# Altium PCB LDO.PcbDoc
Units mil, origin at the board's own origin, x right, y up, seen from the top; angles counter-clockwise.
Board outline 2495 x 920 mil, 4 copper layers (Top Layer, Gnd Layer, Pwr Layer, Bottom Layer), stack 23.756 mil thick; 11 components, 7 nets, 35 pads, 3 vias.
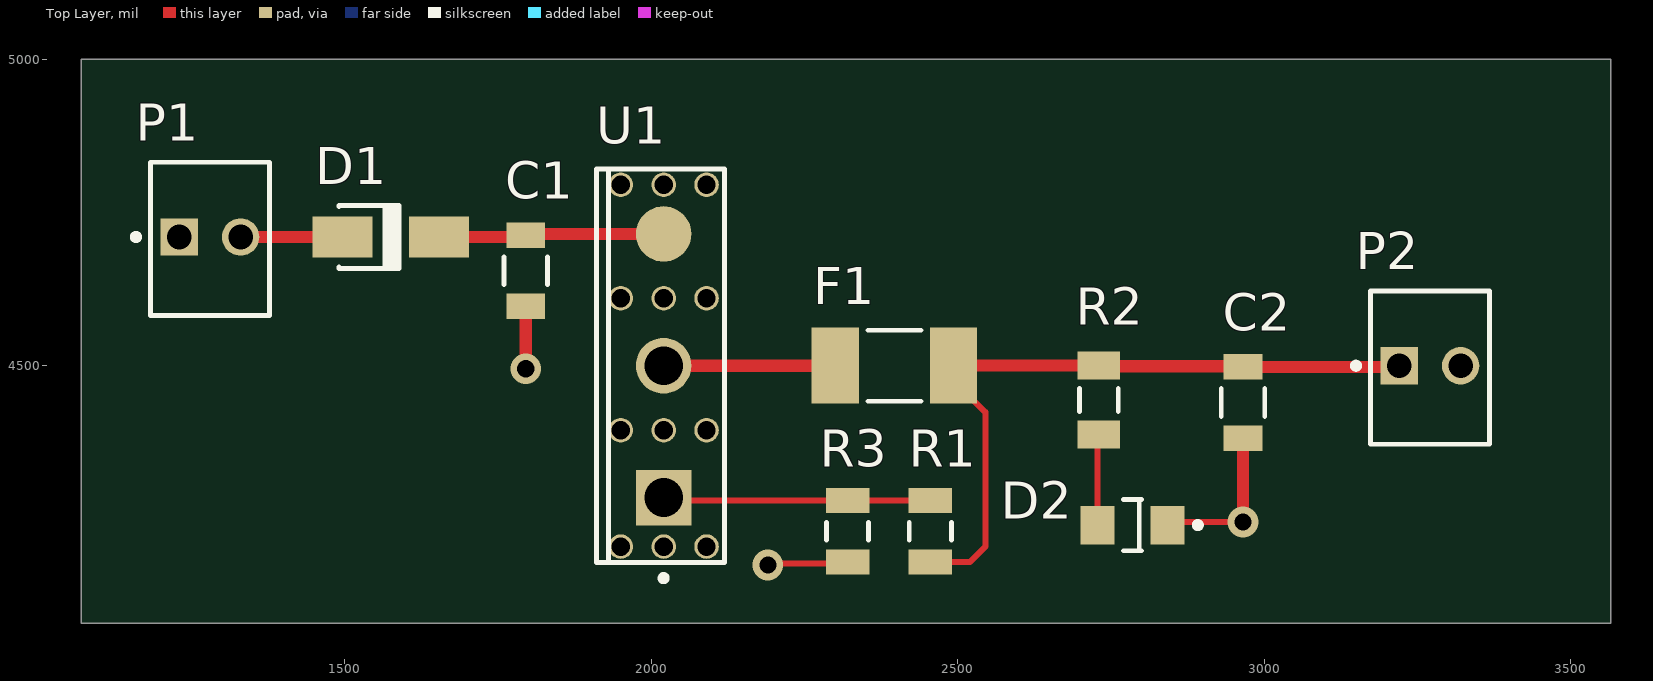
[diagram p0: Top Layer view]
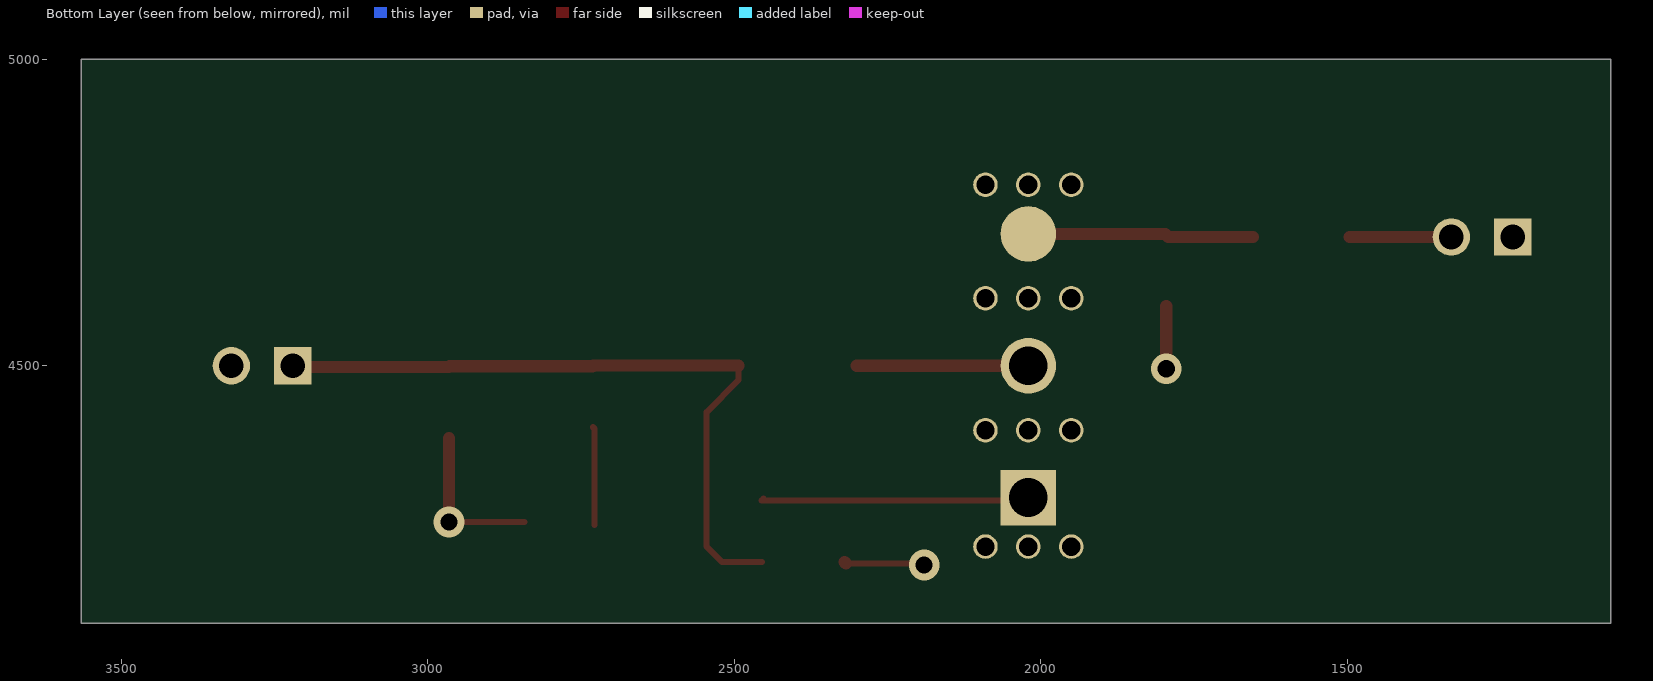
[diagram p1: Bottom Layer view, seen from below]
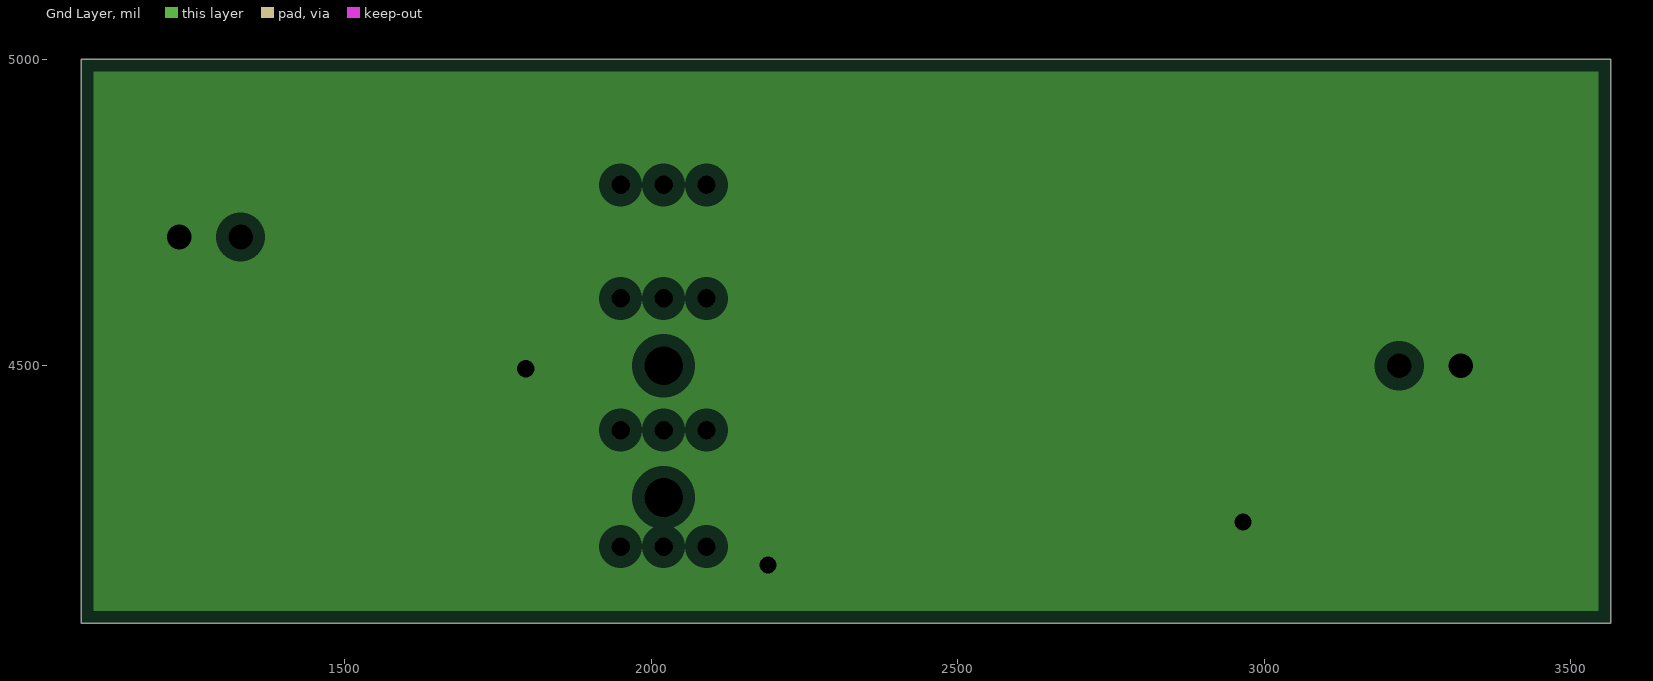
[diagram p2: Gnd Layer, clearances drawn from the general rule]
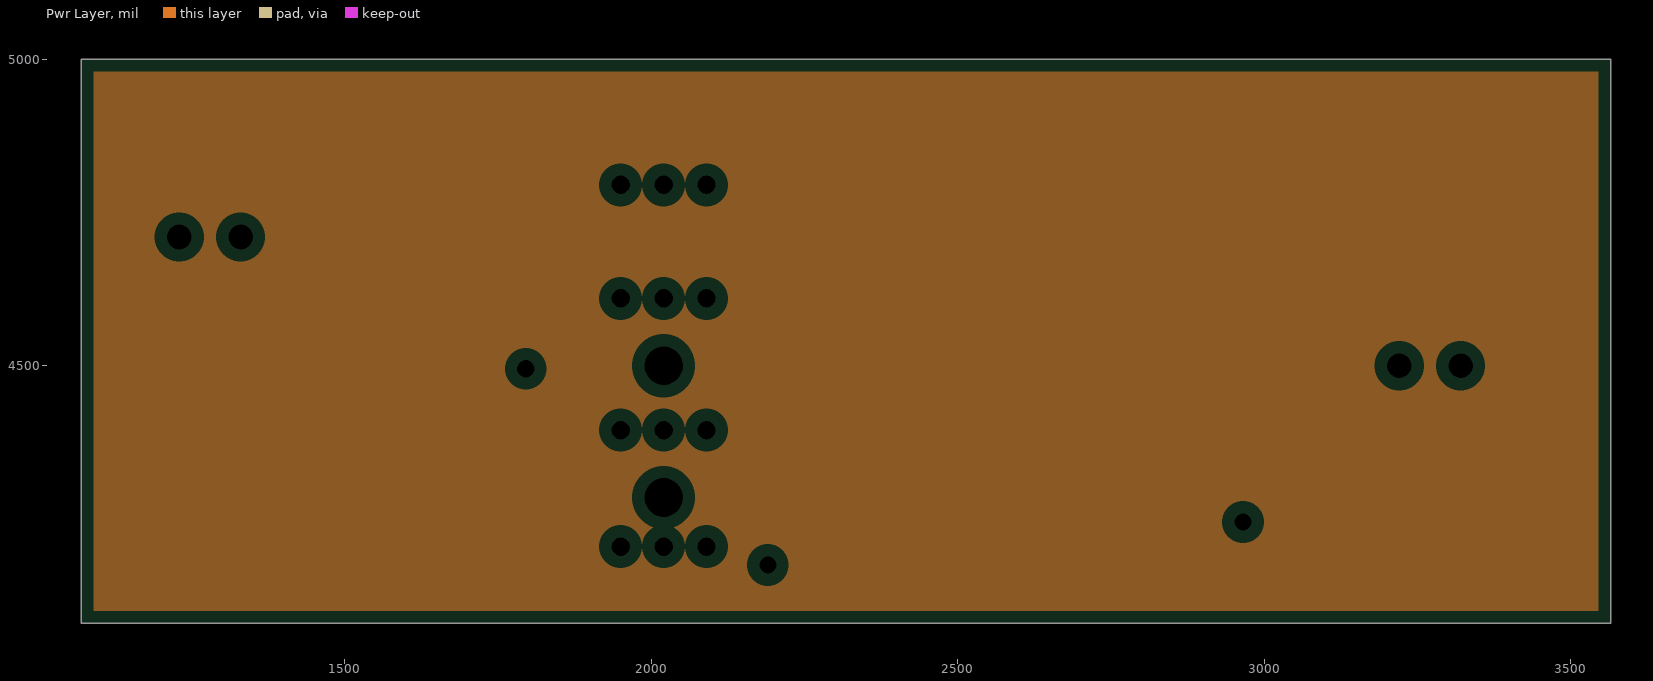
[diagram p3: Pwr Layer, clearances drawn from the general rule]
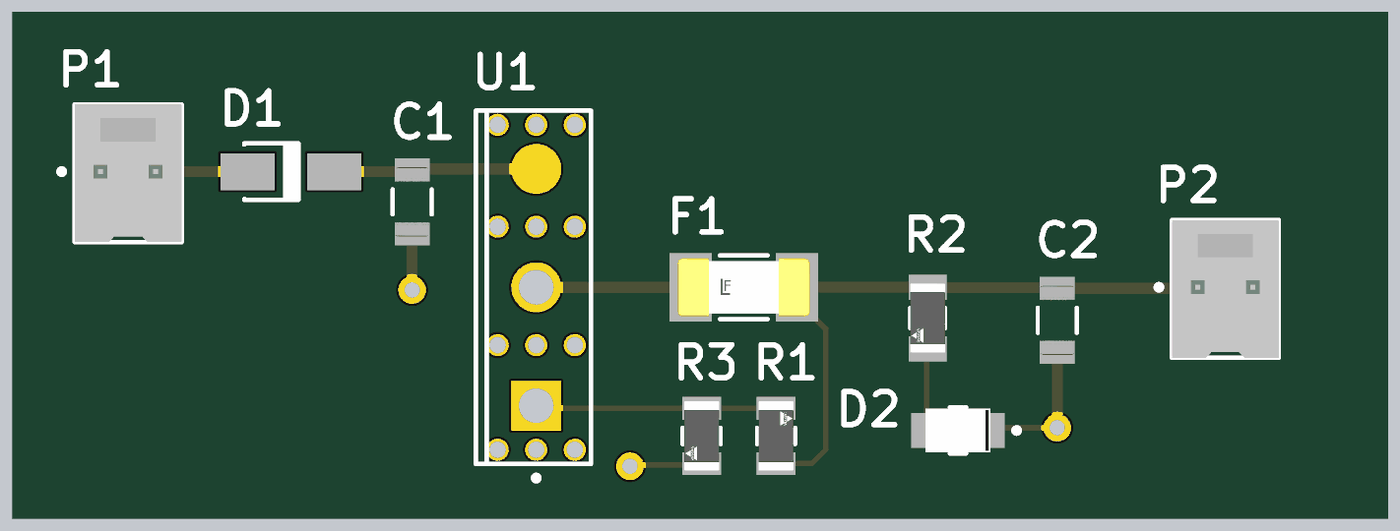
[diagram p4: 3D render of the assembled board from above, using the file's embedded part models]

## Layer stack, top to bottom
Top Solder: solder mask 0.4, Solder Resist, Dk 3.5
Top Layer: signal copper 1.4
Dielectric 2: prepreg 2.8, PP-006, Dk 4.1
Gnd Layer: plane copper 1.378, net GND
Dielectric 1: dielectric 12.6, FR-4, Dk 4.8
Pwr Layer: plane copper 1.378
Dielectric 3: prepreg 2.8, PP-006, Dk 4.1
Bottom Layer: signal copper 1.4
Bottom Solder: solder mask 0.4, Solder Resist, Dk 3.5

## Board outline
1070,4080 3565,4080 3565,5000 1070,5000

## Design rules (kind name [scope] priority, off if disabled: settings)
Clearance [All] p1: gap=10 ignorepadtopadclearanceinfootprint=TRUE except(0: Arc-Hole Track-Hole SMDPad-Hole THPad-Hole Via-Hole Fill-Hole Poly-Hole Region-Hole Text-Hole)
PlaneClearance [All] p1: clearance=20
PlaneConnect [All] p1: planeconnectstyle=Relief reliefexpansion=20 reliefentries=4 reliefconductorwidth=10 reliefairgap=10
PolygonConnect [All] p1: connectstyle=Relief reliefconductorwidth=10 reliefentries=4 polygonreliefangle="90 Angle" airgapwidth=10
RoutingVias [All] p1: holewidth=28 width=50 viastyle="Through Hole" minholewidth=28 minwidth=50 maxholewidth=28 maxwidth=50
SolderMaskExpansion [All] p1: expansion=4 istentingtop=FALSE
Width [All] p1: maxlimit=20 minlimit=10 preferedwidth=20 bottomlayer_prefwidth=10 minimp=50.000000 maximp=50.000000 favimp=50.000000
28 further rules are at their usual default settings.

## Components (designator, comment, footprint, x,y, rotation, side; value= is the part's Value field where it differs from the comment)
C1 "GRM31CR61H106KA12L" FP-GRM31-0_2-MFG 1795,4655 r270 top value=10uF
C2 "GRM31CR61H106KA12L" FP-GRM31-0_2-MFG 2965,4440 r270 top value=10uF
D1 "B230A-13-F" DIOD-SMA-2_V 1575,4710 r0 top
D2 "597-3301-507F" FP-597-3301-507F-MFG 2785,4240 r180 top
F1 "0451002.MRL" FP-0451-MFG 2396.5,4500 r0 top value=0.0367Ω
P1 "22-23-2021" MOLX-22-23-2021_V 1280,4710 r0 top
P2 "22-23-2021" MOLX-22-23-2021_V 3270,4500 r0 top
R1 "CRCW1206100RFKEA" FP-CRCW1206-e3-MFG 2455,4230 r90 top
R2 "CRCW1206499RFKEA" FP-CRCW1206-e3-IPC_B 2730,4444.1 r270 top
R3 "CRCW1206866RFKEA" FP-CRCW1206-e3-MFG 2320,4230 r270 top
U1 "LT1083CP#PBF" LT-P-3-S-TO-247 2020,4500 r180 top

## Footprints (in the part's own frame and the unit in brackets; to place one, negate y for a bottom-side part, rotate by r counter-clockwise, add the part's x,y. Pads: shape width x height; smd on the part's side, far side on the other; paste and mask are expansions set on the pad)
DIOD-SMA-2_V [mm] "SMA, 2-Leads, Body 4.3x2.605mm, Height 2.3mm"
  rect 2.5x1.7 smd: 1(-2,0) 2(2,0)
  silkscreen extent -2.15,-1.3 0.35,1.33, body extent -2.15,-1.3 2.15,1.3, height 2.3
FP-0451-MFG [mil]
  rect 77x124 smd paste+0 mask+0: 1(-96.5,0) 2(96.5,0)
  silkscreen extent -43,-58 43,58, body extent -139,-66 139,66, height 10
FP-597-3301-507F-MFG [mm]
  rect 1.4x1.6 smd paste+0 mask+0: 1(-1.45,0) 2(1.45,0)
  silkscreen extent -2.83,-1.06 0.38,1.06, body extent -2.25,-1.16 2.25,1.16, height 0.25
FP-CRCW1206-e3-IPC_B [mil]
  rect 45.51x69.22 smd paste+0 mask+0: 1(-56.14,0) 2(56.15,0)
  silkscreen extent -19,-31 19,31, body extent -89,-44 89,44, height 10
FP-CRCW1206-e3-MFG [mm]
  rect 1.05x1.8 smd paste+0 mask+0: 1(-1.275,0) 2(1.275,0)
  silkscreen extent -0.38,-0.87 0.38,0.87, body extent -1.9,-1 1.9,1, height 0.25
FP-GRM31-0_2-MFG [mm]
  rect 1.05x1.6 smd paste+0 mask+0: 1(-1.475,0) 2(1.475,0)
  silkscreen extent -0.58,-0.9 0.58,0.9, body extent -2.1,-1 2.1,1, height 0.25
LT-P-3-S-TO-247 [mm] "FM, 3-Leads, Body 16.3x5.3mm, Pitch 5.46mm"
  rect 2.3x2.3 hole 1.6: 1(0,5.46)
  round 2.3 hole 1.6: 2(0,0)
  round 2.3 all layers, no hole: 3(0,-5.46)
  silkscreen extent -2.52,-8.15 2.78,8.92, body extent -2.52,-8.15 2.78,8.15, height 26.42
MOLX-22-23-2021_V [mm] "THD, 2-Leads, Body 6.35x4.93mm, Pitch 2.54mm"
  rect 1.55x1.55 hole 1.02: 1(-1.27,0)
  round 1.55 hole 1.02: 2(1.27,0)
  silkscreen extent -3.19,-3.25 2.46,3.1, body extent -2.46,-3.25 2.46,3.1, height 10.66

## Part data
C1 C2: library part CMP-2000-05256-2, "CAP CER 10UF 50V X5R 1206", Capacitance=10uF, Manufacturer="Murata Electronics North America", Package=GRM31-0.2, Temperature="-55°C to +85°C", Temperature Characteristic=X5R, Temperature Coefficient=15%, Temperature Range High=+85°C, Temperature Range Low=-55°C, Tolerance=10%, Voltage Rating=50V, Automotive=No, Category=Cap, ComponentLink2Description=Datasheet, ComponentLink2URL=https://search.murata.co.jp/Ceramy/image/img/A01X/G101/ENG/GRM31CR61H106KA12-01A.pdf, Device Class L1="Passive Components", Device Class L2=Capacitors, Device Class L3="Ceramic Capacitors", Digikey Description="CAP CER 10UF 50V X5R 1206", Height=1.8mm, Lead Free=Yes, Manufacturer Part Number=GRM31CR61H106KA12L, Material=Ceramic, Mouser Description="Multilayer Ceramic Capacitors MLCC - SMD/SMT 1206 10uF 50volt X5R +/-10%", Octopart=https://octopart.com/grm31cr61h106ka12l-murata-18903335, RoHS=TRUE
D1: library part CMP-0905-00001-1, "2 A Surface Mount Schottky Barrier Rectifier, 30 V, -65 to 150 degC, 2-Pin SMA, RoHS, Tape and Reel", Manufacturer="Diodes Inc", Temperature Range="-65 to 150 degC", ComponentLink1Description="Manufacturer URL", ComponentLink1URL=http://diodes.com/, ComponentLink2Description=Datasheet, ComponentLink2URL=http://diodes.com/datasheets/ds13004.pdf, CT="200 pF", DatasheetVersion="Rev. 21 - 2", IF="2 A", IFSM="50 A", IO="2 A Max.", Mounting Technology="Surface Mount", PackageDescription="2-Pin SMA, Body 4.3 x 2.605 mm, Height 2.3 mm", PackageReference=SMA-2, Packing="Tape and Reel", PartNumber=B230A-13-F, RoHS=TRUE, VF="0.5 V", VR="30 V", VRRM="30 V"
D2: library part CMP-15384-000001-1, "LED GREEN CLEAR 1208 SMD", Colour=Green, Forward Current=20mA, Forward Voltage=2.2V, Manufacturer=Dialight, Power Dissipation=70mW, Temperature="-30°C to +85°C", Temperature Range High=+85°C, Temperature Range Low=-30°C, Automotive=No, Category=Diode, ComponentLink2Description=Datasheet, ComponentLink2URL=http://www.dialightsignalsandcomponents.com/Assets/Drawings/2D_Drawings_DrawingDetailedSpec/C17290.pdf, Device Class L1=Optoelectronics, Device Class L2=LEDs, Device Class L3=unset, Digikey Description="LED GREEN CLEAR 1208 SMD", Height=1.5mm, Lead Free=Yes, Led Orientation="Top View", Luminous Intensity=25mcd, Manufacturer Part Number=597-3301-507F, Mouser Description="Standard LEDs - SMD Green 563nm 16mcd 2.2V 104 deg", Octopart=https://octopart.com/597-3301-507f-dialight-117926, Package=597-3301-507F, Peak Emmision Wavelength=570nm, RoHS=TRUE, Viewing Angle=110°, Wavelength=573nm
F1: library part CMP-08605-000053-1, "FUSE BOARD MNT 2A 125VAC/VDC SMD", Fuse Current=2A, Fuse Interrupt Ac Current=50A, Manufacturer=Littelfuse, Max Fuse Ac Voltage=125V, Package=0451, Resistance=0.0367Ω, Temperature="-55°C to +125°C", Temperature Range High=+125°C, Temperature Range Low=-55°C, Automotive=No, Category=Fuse, ComponentLink2Description=Datasheet, ComponentLink2URL=https://www.littelfuse.com/~/media/electronics/datasheets/fuses/littelfuse_fuse_451_453_datasheet.pdf.pdf, Device Class L1="Circuit Protection", Device Class L2=Fuses, Device Class L3=unset, Digikey Description="FUSE BOARD MNT 2A 125VAC/VDC SMD", Fuse Blow Speed=Fast, Fuse I2T=0.53A2Sec, Fuse Interrupt Dc Current=50A, Height=2.94mm, Lead Free=Yes, Manufacturer Part Number=0451002.MRL, Max Fuse Dc Voltage=125V, Mouser Description="Surface Mount Fuses 125V 2A", Octopart=https://octopart.com/0451002.mrl-littelfuse-566376, RoHS=TRUE, Voltage Rating=125V
P1 P2: library part CMP-1704-00001-3, "Male Header, Pitch 2.54 mm, 1 x 2 Position, Height 10.67 mm, Tail Length 3.56 mm, 0 to 75 degC, RoHS, Bulk", Max Operating Temperature="75 degC", Min Operating Temperature="0 degC", Package Quantity=3000, ComponentLink1Description="Manufacturer URL", ComponentLink1URL=http://www.molex.com/, ComponentLink2Description=Datasheet, ComponentLink2URL=https://datasheet.ciiva.com/19454/232266-19454304.pdf, Height="10.67 mm", Length="5.08 mm", Mount="Through Hole", Mounting Technology="Through Hole", PackageDescription="Male Header, Pitch 2.54 mm, 1 x 2 Position, Height 10.67 mm, Tail Length 3.56 mm", Packaging=Bulk, PartNumber=22-23-2021, Pins=2, Radiation Hardening=No, REACH SVHC=Unknown, RoHSCompliant=True, Width="6.35 mm"
R1: library part CMP-2003-04801-2, "RES Thick Film, 100Ω, 1%, 0.25W, 100ppm/°C, 1206", Case Code (Imperial)=1206, Case Code (Metric)=3216, Max Operating Temperature=155°C, Min Operating Temperature=-55°C, Package Quantity=5000, Power Rating=250mW, Resistance=100R, Temperature Coefficient=100ppm/°C, Tolerance=1%, Voltage Rating=200V, Case/Package=1206, Composition="Thick Film", Contact Plating=Tin, Depth=1.6mm, Height=0.55mm, Lead Free="Lead Free", Length=3.2mm, Military Standard=Not, Mount="Surface Mount", Number of Pins=2, Packaging="Tape and Reel", Radiation Hardening=No, Termination=SMD/SMT, Voltage Rating (DC)=200V, Weight=0.000353oz, Width=1.6mm
R2: library part CMP-2003-02225-2, "RES Thick Film, 499Ω, 1%, 0.25W, 100ppm/°C, 1206", Case Code (Imperial)=1206, Case Code (Metric)=3216, Max Operating Temperature=155°C, Min Operating Temperature=-55°C, Package Quantity=5000, Power Rating=250mW, Resistance=499R, Temperature Coefficient=100ppm/°C, Tolerance=1%, Voltage Rating=200V, Case/Package=1206, Composition="Thick Film", Contact Plating=Tin, Depth=1.6mm, Height=0.55mm, Lead Free="Lead Free", Length=3.2mm, Military Standard=Not, Mount="Surface Mount", Packaging="Tape and Reel", Radiation Hardening=No, Termination=SMD/SMT, Voltage Rating (DC)=200V, Weight=0.000353oz, Width=1.6mm
R3: library part CMP-2003-02411-2, "RES Thick Film, 866Ω, 1%, 0.25W, 100ppm/°C, 1206", Case Code (Imperial)=1206, Case Code (Metric)=3216, Max Operating Temperature=155°C, Max Power Dissipation=250mW, Min Operating Temperature=-55°C, Package Quantity=10, Resistance=866R, Temperature Coefficient=100ppm/°C, Tolerance=1%, Voltage Rating=200V, Case/Package=1206, Composition="Thick Film", Contact Plating=Tin, Depth=1.6mm, Features="Automotive AEC-Q200", Height=0.024inch, Lead Free="Lead Free", Length=3.2mm, Military Standard=Not, Number of Pins=2, Number of Terminations=2, Packaging="Tape and Reel", Power Rating=250mW, Radiation Hardening=No, Termination=SMD/SMT, Voltage Rating (DC)=200V, Weight=0.000353oz, Width=1.6mm
U1: library part CMP-0476-00995-1, "7.5 A Low Dropout Positive Regulator, 2.55 to 30 V Vin, Adjustable Vout, 3-pin FM (P-3), 0 to 150 degC, Pb-Free", Dropout Voltage(V)=1.3, Manufacturer="Linear Technology", Output Voltage=Adj, ComponentLink1Description="Manufacturer URL", ComponentLink1URL=http://www.linear.com/, ComponentLink2Description=Datasheet, ComponentLink2URL=http://cds.linear.com/docs/en/datasheet/108345fg.pdf, ComponentLink3Description="Package Specification", ComponentLink3URL=http://cds.linear.com/docs/en/packaging/P3(TO-3P)%2005-08-1450%20Rev%20A.pdf, DatasheetVersion="Rev. G", Discrete Pass Element=no, Iout(mA)=7500, Isupply(mA)=5, Mounting Technology="Through Hole", Number of Outputs=1, PackageDescription="3-Pin Plastic TO-3P, Body 16.005 x 5.005 mm, Pitch 5.46 mm", PackageReference=P-3, PackageVersion="Rev. A, 06/2012", PartNumber=LT1083CP#PBF, RoHS=TRUE, Vin Max(V)=30, Vin Min(V)=2.55, Vout Max(V)=28.5, Vout Min(V)=1.25

## Free pads (board coordinates)
  round 40 hole 30: 4(1950,4205) 4(1950,4395) 4(1950,4610) 4(1950,4795) 4(2020,4205) 4(2020,4395) 4(2020,4610) 4(2020,4795) 4(2090,4205) 4(2090,4395) 4(2090,4610) 4(2090,4795)

## Via types
v1: diameter 50, hole 28, Top Layer to Bottom Layer, 3 vias

## Nets (pads, with @x,y where several pads share a name; then routed paths per layer and width w, separated by ;. In a path a pad name is that pad's centre, name@x,y a point inside that pad or via, vN(x,y) a via of type N, cw(c..) or ccw(c..) an arc to the next point about the centre after c; other vN are vias at no path point)
GND: C1.2 C2.2 D2.1 P1.1 P2.2 R3.2 | length 493.8
  Top Layer w10: v1@2192.4,4177.4 R3.2@2317.6,4177.4 ; D2.1@2842.09,4245 v1(2965,4245)
  Top Layer w20: v1(1795,4495) C1.2 ; v1(2190,4175) v1@2192.4,4177.4 ; R3.2@2317.6,4177.4 R3.2 ; v1(2965,4245) C2.2
NetC1_1: C1.1 D1.2 U1.3 | length 368.3
  Top Layer w10: C1.1@1791.93,4710 C1.1 C1.1@1796.89,4714.96
  Top Layer w20: D1.2 C1.1@1791.93,4710 ; C1.1@1796.89,4714.96 U1.3
NetC2_1: C2.1 F1.2 P2.1 R1.1 R2.1 | length 1145.8
  Top Layer w10: R1.1 2455.2,4180 2520,4180 2545,4205 2545,4424.5 2493,4476.5 F1.2 ; P2.1@3218.07,4498.07 P2.1
  Top Layer w20: F1.2 2493.25,4500.25 R2.1 2731.09,4499.16 2963.91,4499.16 C2.1 P2.1@3218.07,4498.07
NetD1_1: D1.1 P1.2 | length 166.3
  Top Layer w20: P1.2 D1.1
NetD2_2: D2.2 R2.2 | length 160.6
  Top Layer w10: D2.2 2727.91,4397.67 R2.2@2730,4399.75
NetF1_1: F1.1 U1.2 | length 280
  Top Layer w20: U1.2 F1.1
NetR1_2: R1.2 R3.1 U1.1 | length 441.2
  Top Layer w10: U1.1@2024.84,4280.2 R3.1 R1.2 R1.2@2452.05,4283.15
  Top Layer w20: U1.1 U1.1@2024.84,4280.2

## Polygon pours and split planes (outlines as drawn)
GND on Gnd Layer (split plane): 3544.9,4100.1 1090.1,4100.1 1090.1,4979.9 3544.9,4979.9
no net on Pwr Layer (split plane): 3544.9,4100.1 1090.1,4100.1 1090.1,4979.9 3544.9,4979.9